# Altium PCB PCB1.PcbDoc
Units mil, origin at the board's own origin, x right, y up, seen from the top; angles counter-clockwise.
Board outline 2360 x 2360 mil, 2 copper layers (Top Layer, Bottom Layer); 82 components, 49 nets, 288 pads, 60 vias.
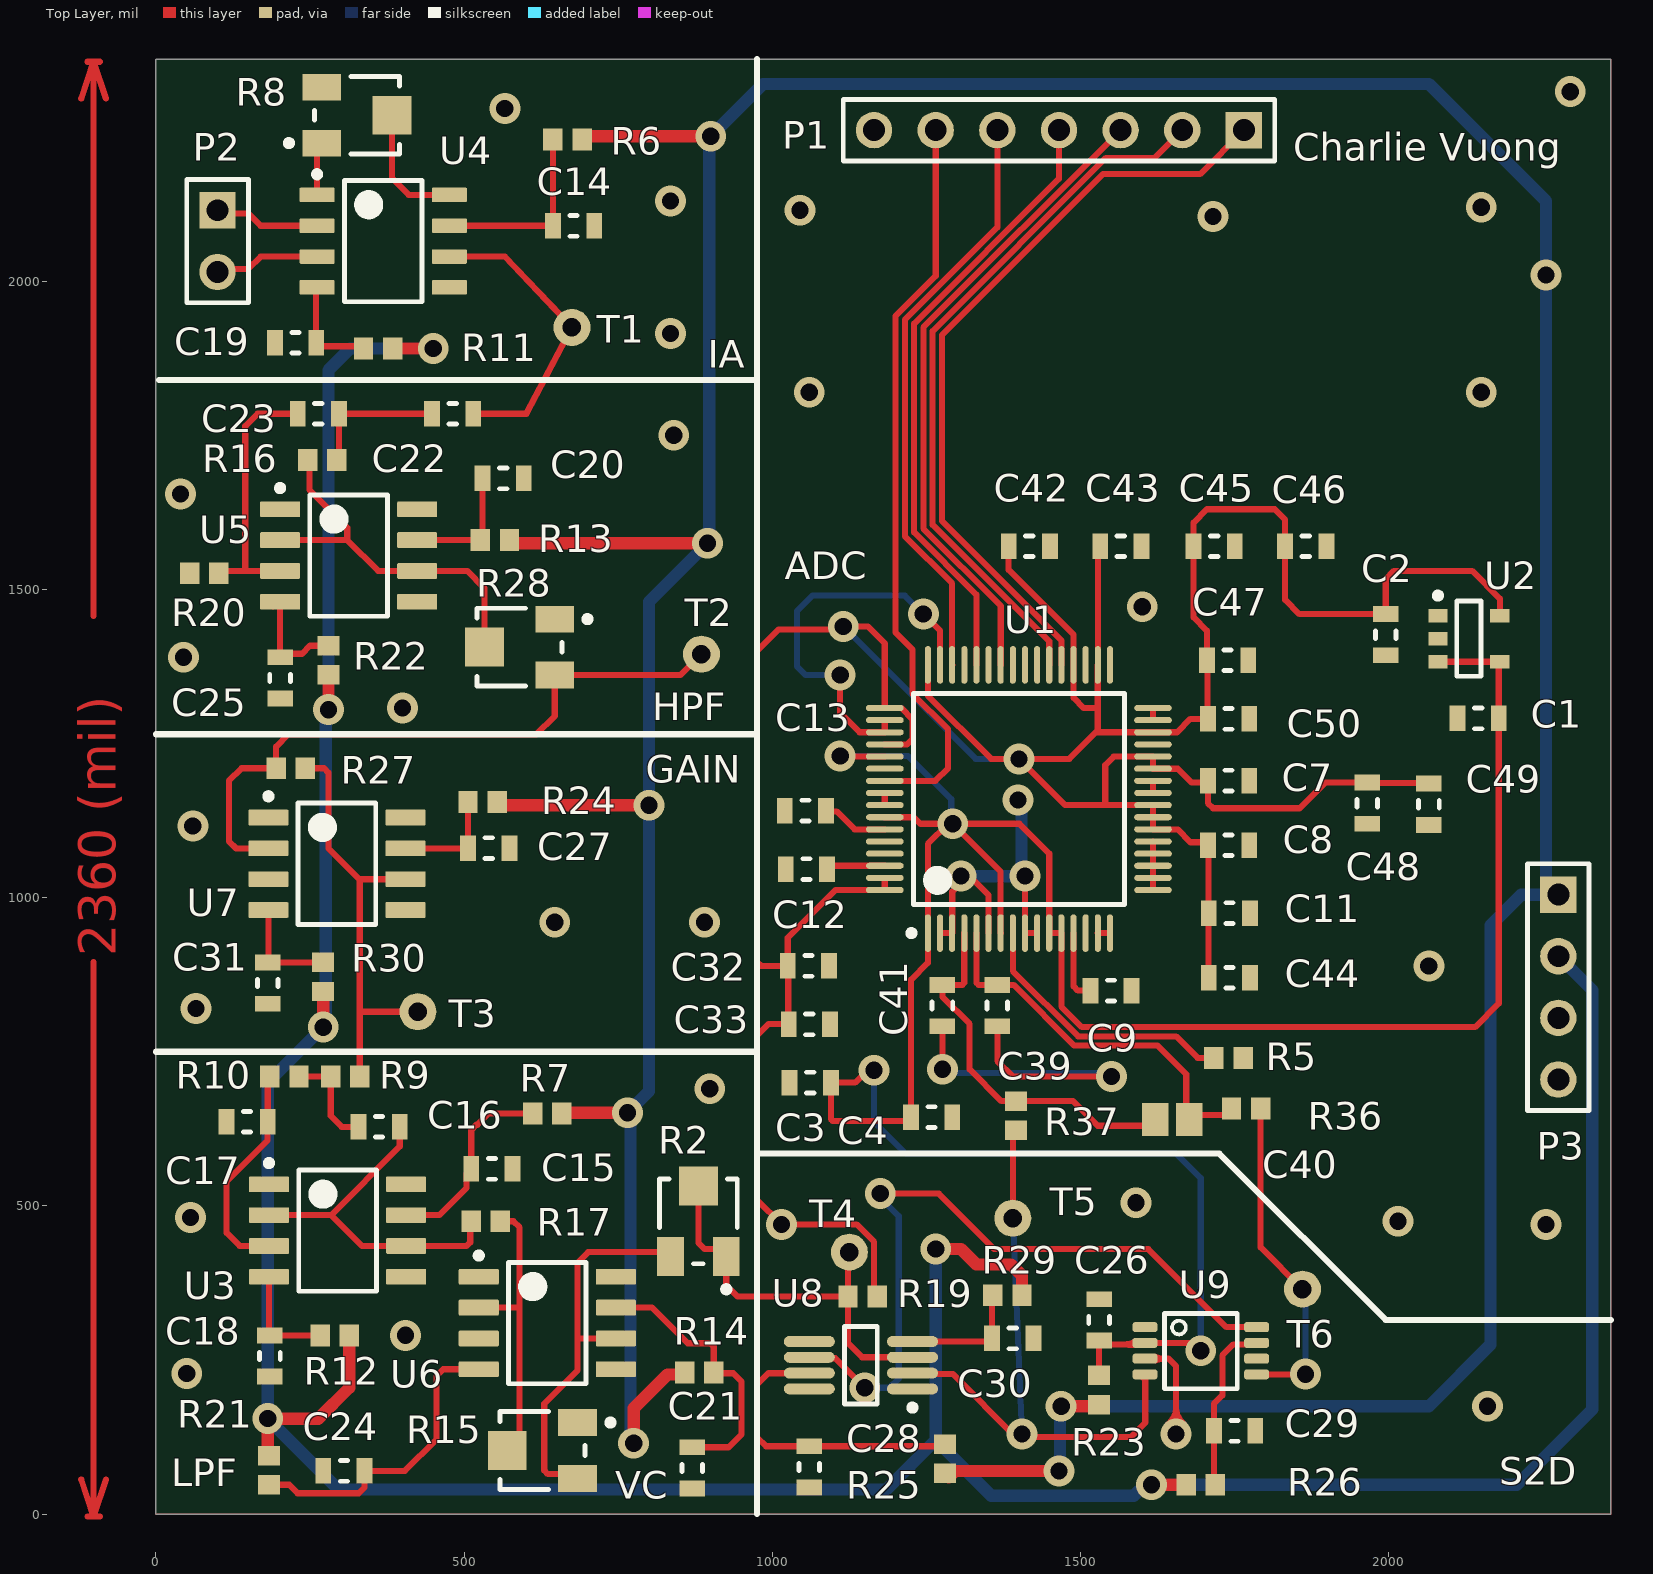
[diagram p0: Top Layer view]
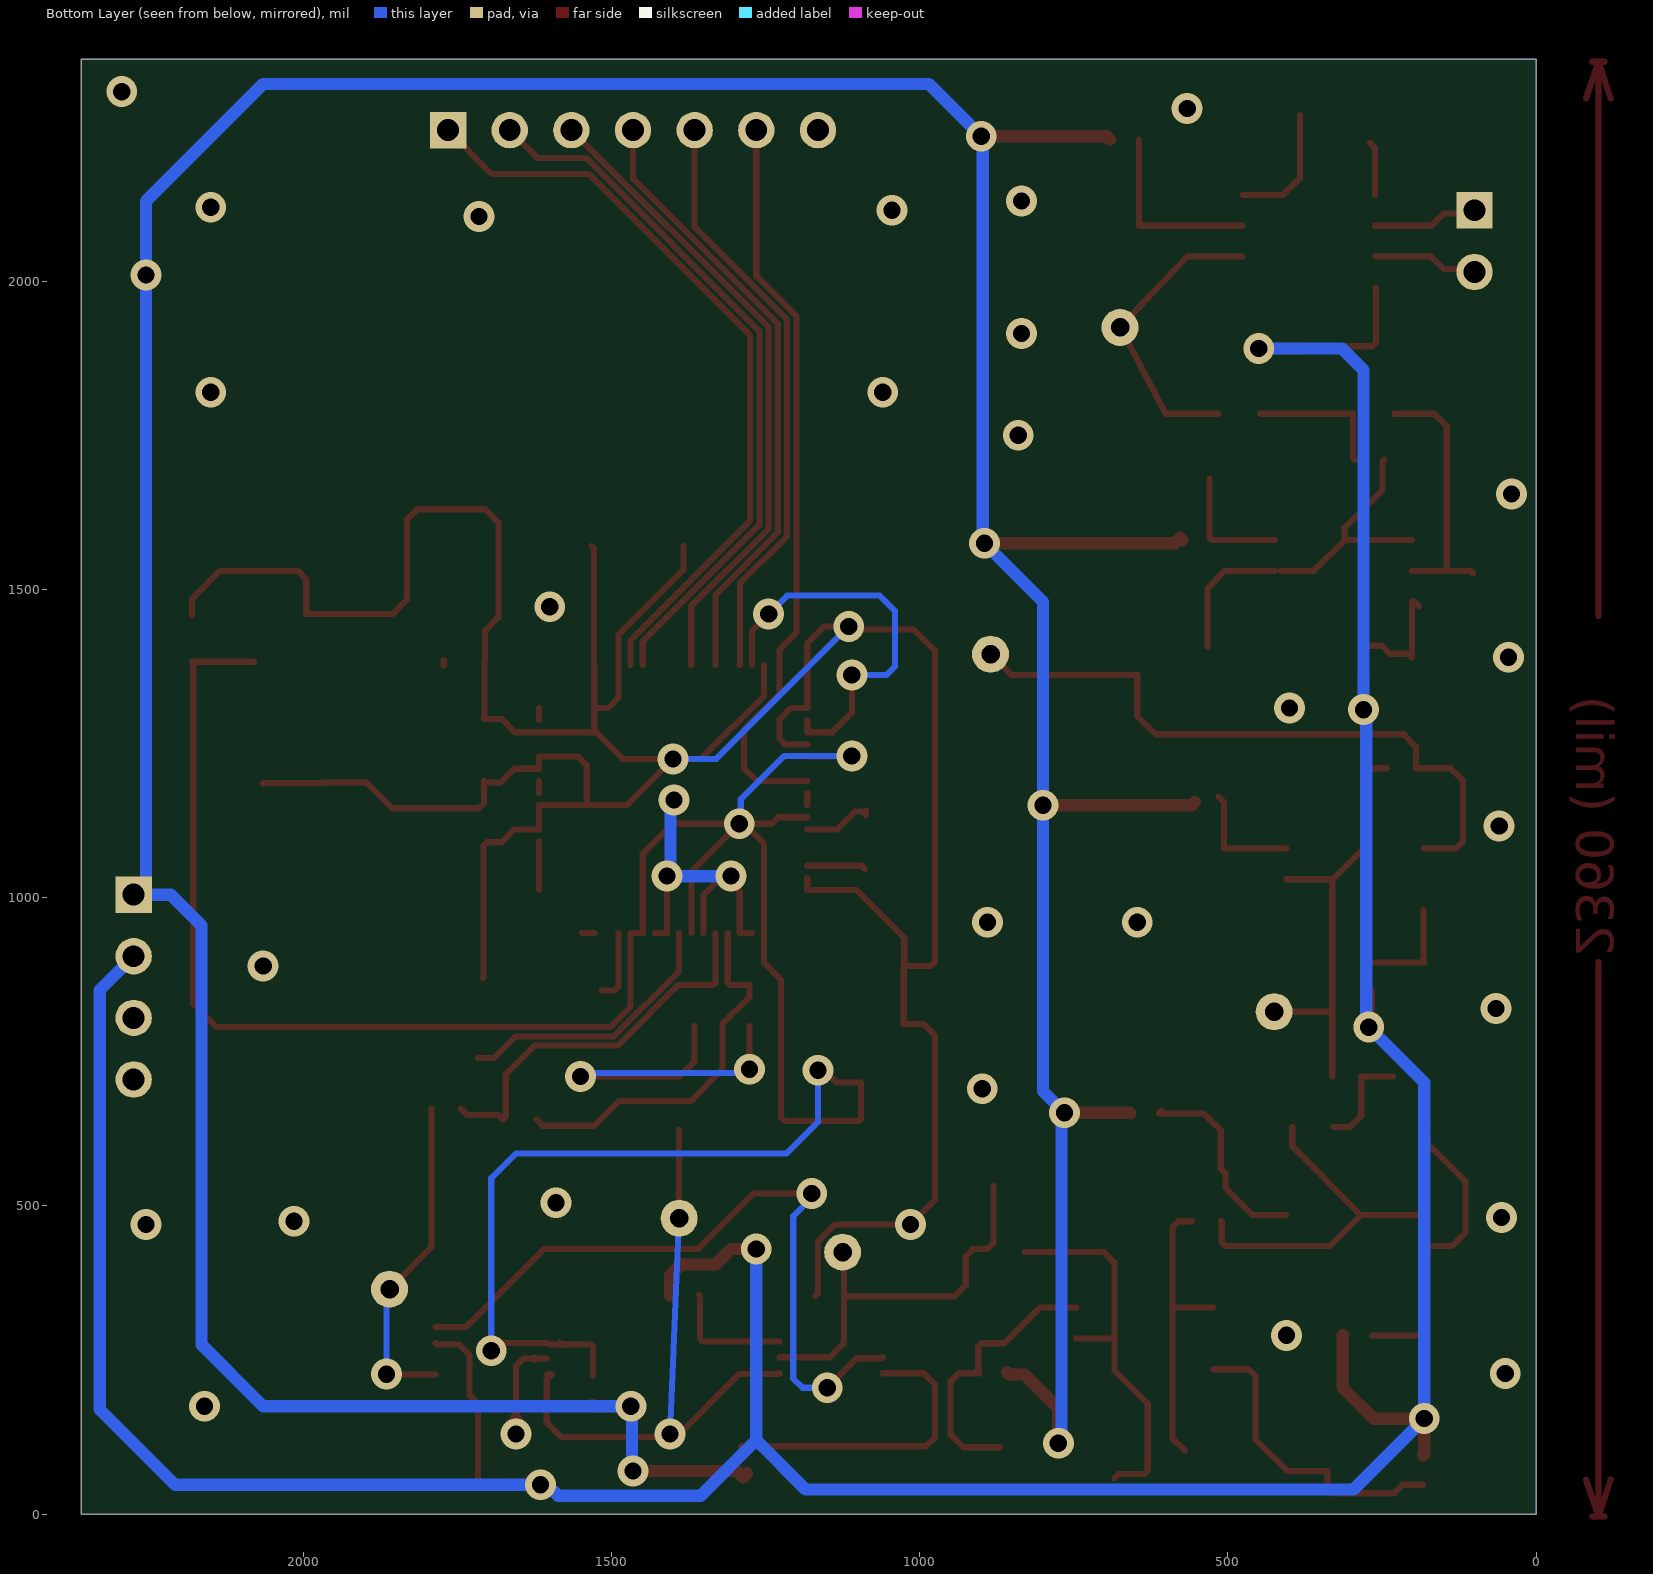
[diagram p1: Bottom Layer view, seen from below]

## Layer stack, top to bottom
Top Solder: solder mask 0.4, Solder Resist, Dk 3.5
Top Layer: signal copper 1.4
Dielectric 1: dielectric 12.6, FR-4, Dk 4.8
Bottom Layer: signal copper 1.4
Bottom Solder: solder mask 0.4, Solder Resist, Dk 3.5

## Board outline
0,0 0,2360 2360,2360 2360,0

## Design rules (kind name [scope] priority, off if disabled: settings)
Clearance [All] p1: gap=5 ignorepadtopadclearanceinfootprint=FALSE except(0: Arc-Hole Track-Hole SMDPad-Hole THPad-Hole Via-Hole Fill-Hole Poly-Hole Region-Hole Text-Text Text-Hole)
MinimumSolderMaskSliver [All] p1: minsoldermaskwidth=1
PolygonConnect [All] p1: connectstyle=Relief reliefconductorwidth=10 reliefentries=4 polygonreliefangle="90 Angle" airgapwidth=10
RoutingVias [All] p1: holewidth=28 width=50 viastyle="Through Hole" minholewidth=28 minwidth=50 maxholewidth=28 maxwidth=50
SilkToSilkClearance [All] p1: silktosilkclearance=5
SilkToSolderMaskClearance [IsPad] p1: minsilkscreentomaskgap=5 clearancetoexposedcopper=TRUE
SolderMaskExpansion [All] p1: expansion=4
Width [All] p1: maxlimit=30 minlimit=10 preferedwidth=10
27 further rules are at their usual default settings.

## Classes and differential pairs
polygon class PolygonClass_1: NONET_L01_P000
component class Sheet1: C14 C15 C16 C17 C18 C19 C20 C21 C22 C23 C24 C25 C26 C27 C28 C29 C30 C31 P2 P3 R2 R6 R7 R8 R9 R10 R11 R12 R13 R14 R15 R16 R17 R19 R20 R21 R22 R23 R24 R25 R26 R27 R28 R29 R30 U3 U4 U5 U6 U7 U8 U9
component class ADC: C1 C2 C3 C4 C7 C8 C9 C11 C12 C13 C32 C33 C39 C40 C41 C42 C43 C44 C45 C46 C47 C48 C49 C50 J1 P1 R5 R36 R37 U1 U2

## Components (designator, comment, footprint, x,y, rotation, side; value= is the part's Value field where it differs from the comment)
C1 "C1608X5R1A106K080AC" CAPC1608X90X20ML10 2145,1290.77 r180 top
C2 "C1608X5R1A106K080AC" CAPC1608X90X20ML10 1995,1426.54 r270 top
C3 "C1608X5R1A106K080AC" CAPC1608X90X20ML10 1061.54,700 r180 top
C4 "C1608X5R1A106K080AC" CAPC1608X90X20ML10 1258.46,644.13 r0 top
C7 "C1608X5R1A106K080AC" CAPC1608X90X20ML10 1740,1190 r0 top
C8 "C1608X5R1A106K080AC" CAPC1608X90X20ML10 1740,1085 r0 top
C9 "C1608X5R1A106K080AC" CAPC1608X90X20ML10 1549.37,849.29 r0 top
C11 "C1608X5R1A106K080AC" CAPC1608X90X20ML10 1741.54,975 r0 top
C12 "C1608X5R1A106K080AC" CAPC1608X90X20ML10 1055.28,1046.38 r180 top
C13 "C1608X5R1A106K080AC" CAPC1608X90X20ML10 1053.74,1141.38 r180 top
C14 "C1608X5R1A106K080AC" CAPC1608X90X20ML10 677.68,2089.76 r180 top
C15 "C1608X5R1A106K080AC" CAPC1608X90X20ML10 545,560 r180 top
C16 "C1608X5R1A106K080AC" CAPC1608X90X20ML10 362.13,628.27 r180 top
C17 "C1608X5R1A106K080AC" CAPC1608X90X20ML10 148.07,636.54 r0 top
C18 "C1608X5R1A106K080AC" CAPC1608X90X20ML10 185,256.54 r90 top
C19 "C1608X5R1A106K080AC" CAPC1608X90X20ML10 226.54,1900 r0 top
C20 "C1608X5R1A106K080AC" CAPC1608X90X20ML10 563.46,1680 r180 top
C21 "C1608X5R1A106K080AC" CAPC1608X90X20ML10 870,75 r90 top
C22 "C1608X5R1A106K080AC" CAPC1608X90X20ML10 481.54,1785 r0 top
C23 "C1608X5R1A106K080AC" CAPC1608X90X20ML10 263.46,1785 r0 top
C24 "C1608X5R1A106K080AC" CAPC1608X90X20ML10 305,70 r0 top
C25 "C1608X5R1A106K080AC" CAPC1608X90X20ML10 201.5,1356.54 r90 top
C26 "C1608X5R1A106K080AC" CAPC1608X90X20ML10 1530,315 r270 top
C27 "C1608X5R1A106K080AC" CAPC1608X90X20ML10 540,1080.44 r180 top
C28 "C1608X5R1A106K080AC" CAPC1608X90X20ML10 1060,76.54 r90 top
C29 "C1608X5R1A106K080AC" CAPC1608X90X20ML10 1750,135 r180 top
C30 "C1608X5R1A106K080AC" CAPC1608X90X20ML10 1390,285 r180 top
C31 "C1608X5R1A106K080AC" CAPC1608X90X20ML10 181.38,861.54 r90 top
C32 "C1608X5R1A106K080AC" CAPC1608X90X20ML10 1058.46,889.29 r0 top
C33 "C1608X5R1A106K080AC" CAPC1608X90X20ML10 1060,794.29 r0 top
C39 "C1608X5R1A106K080AC" CAPC1608X90X20ML10 1365,825 r270 top locked
C40 "C0805C100J5GACTU" CAPC2013X88X50LL20T25 1648.62,640 r0 top
C41 "C1608X5R1A106K080AC" CAPC1608X90X20ML10 1276.02,825 r270 top locked
C42 "C1608X5R1A106K080AC" CAPC1608X90X20ML10 1416.81,1570 r0 top
C43 "C1608X5R1A106K080AC" CAPC1608X90X20ML10 1565.28,1570 r0 top
C44 "C1608X5R1A106K080AC" CAPC1608X90X20ML10 1741.54,870 r0 top
C45 "C1608X5R1A106K080AC" CAPC1608X90X20ML10 1716.81,1570 r0 top
C46 "C1608X5R1A106K080AC" CAPC1608X90X20ML10 1865.28,1570 r0 top
C47 "C1608X5R1A106K080AC" CAPC1608X90X20ML10 1738.46,1385 r0 top
C48 "C1608X5R1A106K080AC" CAPC1608X90X20ML10 1965,1153.27 r270 top
C49 "C1608X5R1A106K080AC" CAPC1608X90X20ML10 2065,1151.54 r270 top
C50 "C1608X5R1A106K080AC" CAPC1608X90X20ML10 1740,1290 r0 top
P1 "Header 7" HDR1X7 1765,2245 r180 top
P2 "Header 2" HDR1X2 100,2115 r270 top locked
P3 "Header 4" HDR1X4 2275,1005 r270 top
R2 "3313J-1-103E" BOUR-3313J-1_V 880,475 r90 top
R5 "RR0816P-241-D" RESC1608X50X30LL20T20 1740,740 r0 top
R6 "10" RESC1608X50X30LL20T20 667.76,2229.76 r0 top
R7 "10" RESC1608X50X30LL20T20 635,650 r0 top
R8 "3313J-1-103E" BOUR-3313J-1_V 326.06,2269.29 r0 top
R9 "10" RESC1608X50X30LL20T20 307.24,710 r0 top
R10 "10" RESC1608X50X30LL20T20 208.62,710 r0 top
R11 "10" RESC1608X50X30LL20T20 360.43,1890.59 r0 top
R12 "10" RESC1608X50X30LL20T20 290,290 r0 top
R13 "10" RESC1608X50X30LL20T20 550,1580 r0 top
R14 "10" RESC1608X50X30LL20T20 881.38,230 r180 top
R15 "3313J-1-103E" BOUR-3313J-1_V 627.13,103.25 r180 top
R16 "10" RESC1608X50X30LL20T20 270,1710 r0 top
R17 "10" RESC1608X50X30LL20T20 535,475 r180 top
R19 "10" RESC1608X50X30LL20T20 1146.38,353.07 r0 top
R20 "10" RESC1608X50X30LL20T20 78.62,1526.38 r180 top
R21 "10" RESC1608X50X30LL20T20 183.54,71.38 r90 top
R22 "10" RESC1608X50X30LL20T20 280,1385 r270 top
R23 "10" RESC1608X50X30LL20T20 1530,201.38 r270 top
R24 "10" RESC1608X50X30LL20T20 530,1155 r0 top
R25 "10" RESC1608X50X30LL20T20 1280,90 r270 top
R26 "10" RESC1608X50X30LL20T20 1695,47.76 r180 top
R27 "10" RESC1608X50X30LL20T20 218.62,1210 r180 top
R28 "3313J-1-103E" BOUR-3313J-1_V 590,1406.54 r180 top
R29 "10" RESC1608X50X30LL20T20 1381.38,355 r0 top
R30 "10" RESC1608X50X30LL20T20 271.38,871.38 r270 top
R36 "10" RESC1608X50X30LL20T20 1768.46,658.27 r180 top
R37 "10" RESC1608X50X30LL20T20 1395,646.38 r90 top
U1 "ADS1675IPAG" TI-PAG64_L 1400,1160 r90 top
U2 "LM4132AMF-3.3/NOPB" DBV0005A_L 2130,1420.12 r0 top
U3 "OP07CDR" D0008A_M 294.76,460 r0 top
U4 "INA128U" D0008A_N 368.86,2065 r0 top
U5 "OP07CDR" D0008A_M 312.72,1555 r0 top
U6 "OP07CDR" D0008A_M 635,310 r0 top
U7 "OP07CDR" D0008A_M 293.78,1055 r0 top
U8 "OP1177ARMZ" ADI-RM-8_M 1143.66,241.61 r180 top
U9 "AD8476" MSOP8 1695,265 r0 top

## Footprints (in the part's own frame and the unit in brackets; to place one, negate y for a bottom-side part, rotate by r counter-clockwise, add the part's x,y. Pads: shape width x height; smd on the part's side, far side on the other; paste and mask are expansions set on the pad)
ADI-RM-8_M [mm] "SOP, 8-Leads, Body 3x3mm, Pitch 0.65mm, IPC Low Density"
  oval 2.1x0.45 smd: 1(-2.125,0.975) 2(-2.125,0.325) 3(-2.125,-0.325) 4(-2.125,-0.975) 5(2.125,-0.975) 6(2.125,-0.325) 7(2.125,0.325) 8(2.125,0.975)
  silkscreen extent -2.25,-1.6 0.67,1.87, body extent -1.6,-1.6 1.6,1.6, height 1.1
BOUR-3313J-1_V [mm] "SMD, 3-Leads, Body 3.5x3.2mm, Pitch 1.15mm"
  rect 1.6x1.1 smd paste+0: 1(-1.45,-1.15) 3(-1.45,1.15)
  rect 1.6x1.6 smd paste+0: 2(1.45,0)
  silkscreen extent -2.92,-1.6 1.75,1.6, body extent -1.75,-1.65 1.75,1.65, height 2.11
CAPC1608X90X20ML10 [mm] "Chip Capacitor, 2-Leads, Body 1.70x0.90mm, IPC Low Density"
  rect 0.65x1.05 smd: 1(-0.85,0) 2(0.85,0)
  silkscreen extent -0.15,-0.43 0.15,0.43, body extent -0.85,-0.45 0.85,0.45, height 0.9
CAPC2013X88X50LL20T25 [mm] "Chip Capacitor, 2-Leads, Body 2.00x1.25mm, IPC High Density"
  rect 1.1x1.35 smd: 1(-0.7,0) 2(0.7,0)
  body extent -1.1,-0.72 1.1,0.72, height 0.88
D0008A_M [mm] "SOIC, 8-Leads, Body 5x4mm, Pitch 1.27mm, IPC Low Density"
  rrect15% 1.65x0.65 smd: 1(-2.825,1.905) 2(-2.825,0.635) 3(-2.825,-0.635) 4(-2.825,-1.905) 5(2.825,-1.905) 6(2.825,-0.635) 7(2.825,0.635) 8(2.825,1.905)
  silkscreen extent -2.95,-2.5 1.6,2.9, body extent -3,-2.45 3,2.45, height 1.63
D0008A_N [mm] "SOIC, 8-Leads, Body 5x4mm, Pitch 1.27mm, IPC Medium Density"
  rrect17% 1.45x0.6 smd: 1(-2.725,1.905) 2(-2.725,0.635) 3(-2.725,-0.635) 4(-2.725,-1.905) 5(2.725,-1.905) 6(2.725,-0.635) 7(2.725,0.635) 8(2.725,1.905)
  silkscreen extent -2.85,-2.5 1.6,2.88, body extent -3,-2.45 3,2.45, height 1.63
DBV0005A_L [mm] "SOT23, 5-Leads, Body 3.05x1.75mm, Pitch 0.95mm, IPC High Density"
  rect 0.8x0.55 smd: 1(-1.275,0.95) 2(-1.275,0) 3(-1.275,-0.95) 4(1.275,-0.95) 5(1.275,0.95)
  silkscreen extent -1.4,-1.55 0.5,1.9, body extent -1.42,-1.46 1.42,1.46, height 1.08
HDR1X2 [mm] "Connector; Header; 2 Position"
  rect 1.5x1.5 hole 0.9: 1(0,0)
  round 1.5 hole 0.9: 2(2.54,0)
  silkscreen extent -1.27,-1.27 3.81,1.27
HDR1X4 [mm] "Connector; Header; 4 Position"
  rect 1.5x1.5 hole 0.9: 1(0,0)
  round 1.5 hole 0.9: 2(2.54,0) 3(5.08,0) 4(7.62,0)
  silkscreen extent -1.27,-1.27 8.89,1.27
HDR1X7 [mm] "Connector; Header; 7 Position"
  rect 1.5x1.5 hole 0.9: 1(0,0)
  round 1.5 hole 0.9: 2(2.54,0) 3(5.08,0) 4(7.62,0) 5(10.16,0) 6(12.7,0) 7(15.24,0)
  silkscreen extent -1.27,-1.27 16.51,1.27
MSOP8 [mm]
  rrect50% 1.02x0.41 smd: 1(-2.3,0.975) 2(-2.3,0.325) 3(-2.3,-0.325) 4(-2.3,-0.975) 5(2.3,-0.975) 6(2.3,-0.325) 7(2.3,0.325) 8(2.3,0.975)
  silkscreen extent -1.5,-1.57 1.5,1.53, body extent -2.46,-1.49 2.44,1.51, height 1.15
RESC1608X50X30LL20T20 [mm] "Chip Resistor, 2-Leads, Body 1.60x0.80mm, IPC High Density"
  rect 0.8x0.9 smd: 1(-0.6,0) 2(0.6,0)
  body extent -0.9,-0.5 0.9,0.5, height 0.5
TI-PAG64_L [mm] "QFP, 64-Leads, Body 10x10mm, Pitch 0.5mm, IPC High Density"
  oval 1.55x0.25 smd: 1(-5.525,3.75) 2(-5.525,3.25) 3(-5.525,2.75) 4(-5.525,2.25) 5(-5.525,1.75) 6(-5.525,1.25) 7(-5.525,0.75) 8(-5.525,0.25) 9(-5.525,-0.25) 10(-5.525,-0.75) 11(-5.525,-1.25) 12(-5.525,-1.75) 13(-5.525,-2.25) 14(-5.525,-2.75) 15(-5.525,-3.25) 16(-5.525,-3.75) 33(5.525,-3.75) 34(5.525,-3.25) 35(5.525,-2.75) 36(5.525,-2.25) 37(5.525,-1.75) 38(5.525,-1.25) 39(5.525,-0.75) 40(5.525,-0.25) 41(5.525,0.25) 42(5.525,0.75) 43(5.525,1.25) 44(5.525,1.75) 45(5.525,2.25) 46(5.525,2.75) 47(5.525,3.25) 48(5.525,3.75)
  oval 0.25x1.55 smd: 17(-3.75,-5.525) 18(-3.25,-5.525) 19(-2.75,-5.525) 20(-2.25,-5.525) 21(-1.75,-5.525) 22(-1.25,-5.525) 23(-0.75,-5.525) 24(-0.25,-5.525) 25(0.25,-5.525) 26(0.75,-5.525) 27(1.25,-5.525) 28(1.75,-5.525) 29(2.25,-5.525) 30(2.75,-5.525) 31(3.25,-5.525) 32(3.75,-5.525) 49(3.75,5.525) 50(3.25,5.525) 51(2.75,5.525) 52(2.25,5.525) 53(1.75,5.525) 54(1.25,5.525) 55(0.75,5.525) 56(0.25,5.525) 57(-0.25,5.525) 58(-0.75,5.525) 59(-1.25,5.525) 60(-1.75,5.525) 61(-2.25,5.525) 62(-2.75,5.525) 63(-3.25,5.525) 64(-3.75,5.525)
  silkscreen extent -5.65,-4.35 4.35,4.55, body extent -5,-5 5,5, height 1.2

## Part data
C1 C2 C3 C4 C7 C8 C9 C11 C12 C13 C14 C15 C16 C17 C18 C19 C20 C21 C22 C23 C24 C25 C26 C27 C28 C29 C30 C31 C32 C33 C39 C41 C42 C43 C44 C45 C46 C47 C48 C49 C50: library part CMP-2000-04979-1, "Chip Capacitor, 10 uF, +/- 10%, 10 V, -55 to 85 degC, 0603 (1608 Metric), RoHS, Tape and Reel", Capacitance=10µF, Manufacturer=TDK, Operating Temperature=-55degC~85degC, Package / Case=0603(1608Metric), Package Description="2-Pin Surface Mount Device, Body 1.6 x 0.8 mm", Package Reference=603, PCN Part Number=MLCCPartNumberChange30/Nov/2012, Ratings=-, Standard Package=1, Temperature Coefficient=X5R, Tolerance=±10%, Voltage - Rated=10V, Applications=GeneralPurpose, Category=Capacitors, Datasheet URL=http://download.siliconexpert.com/pdfs/2015/4/21/15/54/45/779/tdk_/manual/37024850441143360mlcc_commercial_general_en.pdf, Datasheet Version=Mar-15, Design Resources=20WNon-IsolatedBuckLEDDriverUsingPLLNK460KG, Family=CeramicCapacitors, Features=-, Height - Seated (Max)=-, Kits=445-9003-KIT-ND-KITCAPCERHICAPMLCCSMD, Lead Spacing=-, Lead Style=-, Manufacturer URL=http://www.tdk.com/, Mounting Type=SurfaceMount,MLCC, Online Catalog=CSeries,GeneralPurpose, Other Names=445-7486-1, Packaging=CutTape(CT), Product Training Modules=CSeriesGeneralApplicationsSEAT,CCV,andTVCLDesignToolsGuidetoReplacinganElectrolyticCapacitorwithanMLCC, RoHS Information=RoHSCertificate-MLCC, Series=C, Size / Dimension="0.063\"Lx0.031\"W(1.60mmx0.80mm)", Thickness (Max)="0.035\"(0.90mm)"
C40: library part CMP-2007-00219-1, Manufacturer=Kemet, Part Number=C0805C100J5GACTU
P1: "Header, 7-Pin", LatestRevisionDate=17-Jul-2002, LatestRevisionNote="Re-released for DXP Platform.", Publisher="Altium Limited"
P2: "Header, 2-Pin", LatestRevisionDate=17-Jul-2002, LatestRevisionNote="Re-released for DXP Platform.", Publisher="Altium Limited"
P3: "Header, 4-Pin", LatestRevisionDate=17-Jul-2002, LatestRevisionNote="Re-released for DXP Platform.", Publisher="Altium Limited"
R2 R8 R15 R28: library part CMP-2000-05585-1, "Trimming Potentiometer, 10 KOhm, -55 to 125 degC, 3-Pin SMD, RoHS, Tape and Reel", Manufacturer=Bourns, Package Description="3-Pin Surface Mount Device, Body 3.5 x 3.2 mm, Pitch 1.15 mm", Package Reference=3313J-1, Power Rating=125mW, Resistance Tolerance=±20%, Temperature Coefficient=±100ppm/°C, Track Resistance=10kohm, Datasheet URL=http://www.bourns.com/docs/Product-Datasheets/3313.pdf, Datasheet Version=05/2016, Manufacturer URL=http://www.bourns.com/, Mounting Technology=SurfaceMount, No. of Turns=1, Potentiometer Mounting=SMD, RoHS Compliant=Yes, SVHC=NoSVHC(16-Jun-2014)
R5: library part CMP-2000-02559-1, Manufacturer=Susumu, Part Number=RR0816P-241-D
R6 R7 R9 R10 R11 R12 R13 R14 R16 R17 R19 R20 R21 R22 R23 R24 R25 R26 R27 R29 R30 R36 R37: library part CMP-2000-02559-1, Manufacturer=Susumu, Part Number=RR0816P-241-D
U1: library part CMP-0003-00593-1, "4 MSPS, 24-Bit ADC, -40 to 85 degC, 64-pin QFP (PAG64), Green (RoHS & no Sb/Br)", Analog Voltage AV/DD(Max)(V)=5.25, Analog Voltage AV/DD(Min)(V)=4.75, Manufacturer="Texas Instruments", # Input Channels=1, Architecture=Delta-Sigma, Code_JEDEC=MS-026, ComponentLink1Description="Manufacturer URL", ComponentLink1URL=http://www.ti.com/, ComponentLink2Description=Datasheet, ComponentLink2URL=http://www.ti.com/general/docs/lit/getliterature.tsp?genericPartNumber=ADS1675&fileType=pdf, ComponentLink3Description="Package Specification", ComponentLink3URL=http://www.ti.com/lit/ml/mtqf006a/mtqf006a.pdf, DatasheetVersion=SBAS416D, Digital Supply(Max)(V)=3.15, Digital Supply(Min)(V)=2.85, Eco-Plan="Green (RoHS & no Sb/Br)", Interface="Parallel LVDS, Serial SPI", Mounting Technology="Surface Mount", PackageDescription="64-Pin Plastic Flat Pack, Body 10 x 10 mm, Pitch 0.50 mm", PackageReference=PAG64, PackageVersion="4040282/C, 11/1996", PartNumber=ADS1675IPAG, Resolution(Bits)=24, Sample Rate (max)(SPS)=4M, SFDR(dB)=120, SNR(dB)=92, SubFamily="Precision ADC (<=10MSPS)"
U2: library part CMP-0074-00542-5, "Precision Low Dropout Voltage Reference, 5-pin SOT-23, Pb-Free", Manufacturer="Texas Instruments", PackageTopMarking=R4EA*XTT, PowerWise=Y, ComponentLink1Description=Datasheet, ComponentLink1URL=http://www.ti.com/general/docs/lit/getliterature.tsp?genericPartNumber=LM4132&fileType=pdf, CompType="Voltage Reference IC", DatasheetVersion=Aug-2006, High-Reliability=Y, PackageDescription="Molded SOT-23, .115 x .063 x .040 in Body, 5 Lead, .0375 in Pitch", PackageReference=DBV0005A, PackageVersion="revD, Aug-2008", PartNumber=LM4132AMF-3.3/NOPB, PinCount=5, RevisionNote="PowerWise parameter updated.", RoHS=Y
U3 U5 U6 U7: library part CMP-0015-00070-2, "Low-Offset Voltage Operational Amplifier, 6 to 36 V, 0 to 70 degC, 8-pin SOIC (D8), Green (RoHS & no Sb/Br)", Manufacturer="Texas Instruments", Rating=Catalog, Total Supply Voltage(Max)(+5V is 5, +/-5V is 10)=36, Total Supply Voltage(Min)(+5V is 5, +/-5V is 10)=6, CMRR(Min)(dB)=100, Code_JEDEC=MS-012, ComponentLink1Description="Manufacturer URL", ComponentLink1URL=http://www.ti.com/, ComponentLink2Description=Datasheet, ComponentLink2URL=http://www.ti.com/lit/ds/symlink/op07c.pdf, ComponentLink3Description="Package Specification", ComponentLink3URL=http://www.ti.com/litv/pdf/msoi002j, DatasheetVersion=SLOS099E, Eco-Plan="Green (RoHS & no Sb/Br)", GBW(Typ)(MHz)=0.6, IIB(Max)(pA)=7000, Iq per channel(Max)(mA)=5, Mounting Technology="Surface Mount", Number of Channels=1, Offset Drift(Typ)(uV/C)=0.5, PackageDescription="8-Pin Plastic Small Outline, Body 4.9 x 3.9 mm, Pitch 1.27 mm", PackageReference=D0008A, PackageVersion="4040047-3/M, 06/2011", PartNumber=OP07CDR, Slew Rate(Typ)(V/us)=0.3, Sub Family="General Purpose Amplifier, High Supply Voltage Amplifier (>=30V), Low Noise Amp (<=10nV/rtHz), Low Offset Voltage Amplifier (<=500uV)", Vio (25C)(Max)(mV)=0.15, Vn at 1kHz(Typ)(nV/rtHz)=9.8
U4: library part CMP-0992-00017-2, "Precision, Low Power Instrumentation Amplifier, -40 to 85 degC, 8-pin SOIC (D8), Green (RoHS & no Sb/Br)", Input Bias Current (+/-)(Max)(nA)=5, Manufacturer="Texas Instruments", Quiescent Current (+/-)(Typ)(mA)=0.7, CMRR(Min)(dB)=120, Code_JEDEC=MS-012, ComponentLink1Description="Manufacturer URL", ComponentLink1URL=http://www.ti.com/, ComponentLink2Description=Datasheet, ComponentLink2URL=http://www.ti.com/general/docs/lit/getliterature.tsp?genericPartNumber=INA128&fileType=pdf, ComponentLink3Description="Package Specification", ComponentLink3URL=http://www.ti.com/litv/pdf/msoi002j, DatasheetVersion=SBOS051B, Eco-Plan="Green (RoHS & no Sb/Br)", Gain(V/V)="1 to 10000", Input Offset (+/-)(Max)(uV)=50, Input Offset Drift (+/-)(Max)(uV/Degrees Celsius)=0.5, Mounting Technology="Surface Mount", Noise at 1kHz(Typ)(nV/rt(Hz))=8, Non-Linearity (+/-)(Max)(%)=0.002, Number of Channels=1, PackageDescription="8-Pin Plastic Small Outline, Body 4.9 x 3.9 mm, Pitch 1.27 mm", PackageReference=D0008A, PackageVersion="4040047-3/M, 06/2011", PartNumber=INA128U, SubFamily="Dual Supply", Vs(Max)(V)=36, Vs(Min)(V)=4.5
U8: library part ADI-AD_ADA_OPXXXX-X-8, "Single Channel Wide Bandwidth Operational Amplifier, 1.3 MHz BW, 700 mV/us SR, Industrial, 8-pin SOP (RM-8), Tube", Amplifiers Per Package=1, Generic Part Number=OP1177, Input Bias Current=500pA, Input Offset Voltage=15uV, Manufacturer="Analog Devices", Code_JEDEC=MO-187-AA, ComponentLink1Description="Manufacturer URL", ComponentLink1URL=http://www.analog.com/en/index.html, ComponentLink2Description=Datasheet, ComponentLink2URL=http://www.analog.com/static/imported-files/data_sheets/OP1177_2177_4177.pdf, ComponentLink3Description="Package Specification", ComponentLink3URL=http://www.analog.com/static/imported-files/packages/PKG_PDF/MSOP%28RM%29/RM_8.pdf, ComponentLink4Description="Reference Circuit", ComponentLink4URL=http://www.analog.com/en/all-operational-amplifiers-op-amps/operational-amplifiers-op-amps/op1177/products/product.html#product-recommendations, DatasheetVersion="Rev. G", Iq/Amp=500uA, Mounting Technology="Surface Mount", PackageDescription="8-Pin Mini Small Outline Package, Body 3 x 3 mm, Pitch 0.65 mm", PackageReference=RM-8, PartNumber=OP1177ARMZ, RevisionNote="Reference Circuit URL fixed", Slew Rate=700mV/us, Small Signal Bandwidth=1.3MHz, V Span Max=36V, V Span Min=5V

## Free pads (board coordinates)
  round 60 hole 30: 2(675,1925) 5(425,815) 7(1125,425) 8(1390.16,480) 9(1860,365) 10(885,1395)

## Via types
v1: diameter 50, hole 28, Top Layer to Bottom Layer, 60 vias

## Nets (pads, with @x,y where several pads share a name; then routed paths per layer and width w, separated by ;. In a path a pad name is that pad's centre, name@x,y a point inside that pad or via, vN(x,y) a via of type N, cw(c..) or ccw(c..) an arc to the next point about the centre after c; other vN are vias at no path point)
+5V: P3.1 R6.2 R7.2 R13.2 R14.2 R23.2 R24.2 R25.2 | length 7750
  Top Layer w20: R24.2 558.62,1150 v1(800,1150) ; R13.2 577.24,1583.62 585.87,1575 v1(895,1575) ; R7.2 659.72,651.09 v1(765,651.09) ; R6.2 696.61,2235 v1(900,2235) ; v1(775,115) 775,171.61 830,226.61 854.37,226.61 R14.2 ; R25.2 1286.38,60 1296.38,70 v1(1465,70) ; v1(1468.52,175) 1527.24,175 R23.2 ; v1@2253.46,2008.46 v1(2255,2010)
  Bottom Layer w10: P3.1@2255,1025 P3.1
  Bottom Layer w20: v1(775,115) 770,120 770,646.09 v1(765,651.09) 800,686.09 v1(800,1150) 800,1480 v1(895,1575) 897.5,1577.5 897.5,2232.5 v1(900,2235) 985,2320 2065,2320 2255,2130 v1(2255,2010) P3.1@2255,1025 ; v1(1465,70) 1466.76,71.76 1466.76,173.24 v1(1468.52,175) 2065,175 2165,275 2165,955 2215,1005 P3.1
-5V: P3.2 R11.2 R12.2 R21.2 R22.2 R26.2 R29.2 R30.2 | length 6043.9
  Top Layer w20: R21.2 181.38,97.17 v1(181.38,155) 263.62,155 313.62,205 R12.2 ; R30.2 271.54,847.6 v1(271.54,790) ; v1(280,1305) R22.2 ; R11.2 384.25,1890.79 v1(450,1890.79) ; v1(1265,430) 1306.02,430 1331.02,405 1387.09,405 1405,387.09 R29.2 ; v1(1615,47.76) R26.2
  Bottom Layer w20: v1(450,1890.79) 315,1890.79 280,1855.79 v1(280,1305) 275.77,1300.77 275.77,794.23 v1(271.54,790) 181.38,699.84 v1(181.38,155) 296.38,40 1185,40 1265,120 ; v1(1265,430) 1265,120 ; P3.2 2330,850 2330,170 2207.76,47.76 v1(1615,47.76) 1604.18,47.76 1586.42,30 1355,30 1265,120
CLK: P1.6 U1.55 | length 1208.2
  Top Layer w10: U1.55 1182.56,1189.45 1264.45,1189.45 1285,1210 1285,1273.51 1227.32,1331.19 1227.32,1402.8 1200,1430.12 1200,1943.64 1265,2008.64 P1.6
CS: P1.2 U1.38 | length 1159.8
  Top Layer w10: U1.38 1449.13,1377.6 1449.13,1415.87 1260,1605 1260,1918.79 1541.21,2200 1620,2200 P1.2
DOUT: P1.4 U1.44 | length 1006.7
  Top Layer w10: U1.44 1331.02,1377.6 1331.02,1491.55 1230,1592.57 1230,1931.21 1465,2166.21 P1.4
DRATE0: C2.1 C7.1 C8.1 C11.1 C32.1 C33.1 C42.1 C43.1 C44.1 C45.1 C46.1 C47.1 C48.1 C49.1 C50.1 R19.2 U1.22 U1.23 U1.24 U1.27 U1.28 U1.30 U1.34 U1.36 U1.48 U1.49 U1.52 U1.63 U1.64 U2.5 | length 5975.7
  Top Layer w10: C33.1 C33.1@1025.77,795.06 ; R19.2 1165,358.07 1165,441.57 1136.57,470 v1(1015,470) 975,510 975,776.4 993.66,795.06 C33.1@1025.77,795.06 ; U1.63 U1.64 1102.36,1012.36 1025,935 C32.1 ; U1.52 1182.56,1248.66 1218.66,1248.66 1227.32,1257.32 1227.32,1289.8 1209.57,1307.56 1182.56,1307.56 U1.49 1182.48,1412.52 1155,1440 v1(1115,1440) 1110,1435 1010,1435 975,1400 975,896.18 981.89,889.29 C32.1 ; U1.48 1252.36,1327.64 1355,1225 v1(1400,1225) ; C42.1 1383.35,1531.65 1488.58,1426.42 U1.36 1488.58,1324.06 1505,1307.64 1527.95,1307.64 1527.95,1271.22 1525,1268.27 ; 1527.95,1310 U1.34 1528.03,1377.6 1528.03,1566.22 C43.1 ; C44.1 1707.3,870.77 1707.3,1084.23 C8.1 1701.54,1090 1678.23,1090 1657.52,1110.71 1617.6,1110.71 U1.22 U1.23 U1.24 1540,1150.16 ; C49.1 2064.13,1185.87 1965.87,1185.87 C48.1 1896.89,1186.73 1855.16,1145 1715,1145 1706.54,1153.46 C7.1 1703.27,1186.73 1680,1186.73 1657.6,1209.13 1617.6,1209.13 U1.27 U1.28 1553.9,1228.9 1540,1215 1540,1150.16 ; U2.5 2180.2,1484.8 2135,1530 2008.35,1530 1995,1516.65 C2.1 1855,1460 1831.81,1483.19 C46.1 1831.81,1613.19 1815,1630 1705,1630 1683.35,1608.35 C45.1 1683.35,1454.92 1705,1433.27 C47.1 1705.77,1384.23 1705.77,1290.77 C50.1 1678.23,1290 1656.57,1268.35 1617.6,1268.35 U1.30 1525,1268.27 ; C32.1 1025.77,888.52 C33.1@1025.77,795.06 ; v1(1400,1225) 1481.73,1225 1525,1268.27 ; v1(1400,1225) 1474.84,1150.16 1540,1150.16
  Bottom Layer w10: v1(1115,1440) 1330,1225 v1(1400,1225)
DRATE1: C1.2 C2.2 C3.2 C4.2 C7.2 C8.2 C9.2 C11.2 C12.2 C13.2 C14.1 C15.1 C17.1 C18.1 C19.1 C20.1 C21.1 C24.1 C25.1 C26.1 C27.1 C28.1 C29.1 C30.1 C31.1 C32.2 C33.2 C39.2 C41.2 C42.2 C43.2 C44.2 C45.2 C46.2 C47.2 C48.2 C49.2 C50.2 P1.7 P3.3 P3.4 R5.2 R20.2 U1.2 U1.3 U1.6 U1.9 U1.10 U1.14 U1.15 U1.16 U1.17 U1.18 U1.19 U1.20 U1.21 U1.25 U1.26 U1.29 U1.31 U1.32 U1.33 U1.35 U1.47 U1.50 U1.51 U1.54 U1.56 U1.57 U1.60 U1.61 U2.2 U4.5 U6.3 U7.3 U9.1 U9.3 | length 2163.3
  Top Layer w10: v1(1110,1361.38) 1110,1300 1141.65,1268.35 1182.4,1268.35 U1.51 U1.50 U1.50@1182.4,1288.03 ; U1.57 U1.56 ; v1(1245,1460) 1272.05,1432.95 U1.47 ; U1.2 U1.3 1291.73,1009.88 1306.02,1024.18 v1@1306.02,1026.02 ; v1(1276.02,721.54) C41.2 ; v1(1306.02,1035) v1@1306.02,1026.02 ; U1.6 1350.71,942.56 1350.71,1004.29 1328.98,1026.02 v1@1306.02,1026.02 ; C39.2 1365,735 1390,710 v1(1550,710) ; v1(1409.84,1035) U1.9 U1.10 ; U1.15 U1.16 ; U9.3 1642.8,252.2 1655,240 v1(1655,130) ; U1.17 U1.18 U1.19 U1.20 U1.21 ; U1.25 U1.26 ; U1.31 U1.32 ; C47.2@1771.93,1377.13 C47.2
  Bottom Layer w10: v1(1110,1361.38) 1053.62,1361.38 1040,1375 1040,1465 1065,1490 1215,1490 v1(1245,1460) ; v1(1276.02,721.54) 1281.79,715.77 1544.23,715.77 v1(1550,710)
  Bottom Layer w20: v1(1306.02,1035) v1(1409.84,1035) 1404.23,1040.61 1404.23,1152.89 v1(1398.62,1158.5)
  other v1: 2160,175 50,228.23 405,290 2255,470 2015,475 56.26,481.25 1590,505 898.62,690 65,820.06 2065,889.29 647.09,960 890,960 60,1116.38 400,1307.64 45,1390 1600,1471.83 40,1655 840,1750 1060,1820 2150,1820 835,1915 1715,2105 1045,2115 2150,2120 835,2130 566.14,2280 2294.37,2307.48
DRDY: P1.5 U1.46 | length 961.4
  Top Layer w10: U1.46 1291.65,1377.6 1291.65,1509.71 1215,1586.36 1215,1937.43 1365,2087.43 P1.5
FB1: R16.1 R28.2 U5.2 U5.6 | length 606.2
  Top Layer w10: U5.2 310.43,1580 ; R16.1 248.98,1707.4 248.98,1661.46 310.43,1600 310.43,1580 ; U5.6@414.37,1530 360.43,1530 310.43,1580 ; U5.6 505,1530 532.91,1502.09 R28.2
FB2: pad.5 R9.2 R27.1 U7.6 | length 728.9
  Top Layer w10: R27.1 272.99,1210 280,1202.99 280,1080 330,1030 ; R9.2 330.87,815 ; U7.6 330,1030 ; pad.5@430,815 330.87,815 ; 330,1030 330.87,1029.13 330.87,815
FB3: C16.1 R17.2 U3.2 U3.6 | length 573.7
  Top Layer w10: U3.2 284.15,485 ; C16.1 395.59,596.44 284.15,485 ; R17.2 510,473.62 510,440.86 504.14,435 U3.6 334.15,435 284.15,485
FB4: R2.3 R15.3 U6.6 | length 634.9
  Top Layer w10: R15.3 677.19,65 635.86,65 630,70.86 630,178.97 684.22,233.19 684.22,285 686.38,285 ; U6.6 686.38,285 ; R2.3@830,425 701.22,425 684.22,408 684.22,287.16 686.38,285
FB5: pad.8 R37.1 U8.2 U9.4 | length 1014.8
  Top Layer w10: U8.2@1227.32,227.09 U8.2 1228.8,227.34 1292.66,227.34 1395,125 1581.48,125 1605,148.52 1605,218.09 1596.48,226.61 U9.4 ; pad.8 R37.1@1390.16,622.76
  Bottom Layer w10: pad.8 v1(1405,130)
NetC9_1: C9.1 U1.13 | length 116.3
  Top Layer w10: U1.13 1488.58,856.42 1495.71,849.29 C9.1
NetC12_1: C12.1 U1.62 | length 96
  Top Layer w10: C12.1 1094.09,1051.73 U1.62
NetC13_1: C13.1 U1.59 | length 117.9
  Top Layer w10: C13.1 1087.2,1133.5 1093.7,1140 1104.27,1140 1133.48,1110.79 U1.59
NetC14_2: C14.2 R6.1 U4.7 | length 308.2
  Top Layer w10: U4.7 643.98,2090 C14.2 644.21,2229.68 R6.1
NetC15_2: C15.2 R7.1 U3.7 | length 330
  Top Layer w10: U3.7 460,485 504.14,529.14 504.14,552.61 C15.2 511.54,623.07 520,631.54 521.54,631.54 540,650 R7.1 ; R7.1@608.02,655 R7.1@611.93,651.09
NetC16_2: C16.2 R9.1 R10.2 | length 167.7
  Top Layer w10: R10.2 R9.1 283.62,646.14 301.5,628.27 C16.2
NetC17_2: C17.2 R10.1 U3.3 | length 367.7
  Top Layer w10: C17.2@176.54,631.54 C17.2@178.07,633.07 ; U3.3 135.86,435 114.61,456.25 114.61,539.61 180.87,605.87 180.87,635.87 C17.2 181.54,706.54 R10.1 R10.1@188.46,706.54
NetC18_2: C18.2 R12.1 U3.4 | length 177
  Top Layer w10: U3.4 183.54,291.46 C18.2 R12.1
NetC19_2: C19.2 R11.1 U4.4 | length 169.3
  Top Layer w10: U4.4 260,1988.43 C19.2 265.59,1894.41 326.06,1894.41 R11.1@333.35,1887.13
NetC20_2: C20.2 R13.1 U5.7 | length 203.9
  Top Layer w10: U5.7 R13.1 530,1583.62 C20.2
NetC21_2: C21.2 R14.1 U6.7 | length 452.9
  Top Layer w10: U6.7 805,335 862.76,277.24 899.14,277.24 905,271.39 R14.1 ; C21.2 929.14,108.46 950,129.32 950,215 936.54,228.46 R14.1@903.46,228.46
NetC22_1: C22.1 C23.2 R16.2 | length 227.5
  Top Layer w10: R16.2 296.93,1713.31 C23.2 C22.1
NetC23_1: C23.1 R20.1 U5.3 | length 429
  Top Layer w10: R20.1 105.87,1530 135,1530 145,1530 ; U5.3 145,1530 ; C23.1 165,1785 145,1765 145,1530
NetC24_2: C24.2 R21.1 U6.4 | length 507
  Top Layer w10: R21.1 216.26,47.76 230,34.02 329.02,34.02 338.46,43.46 338.46,65 C24.2@343.46,70 ; C24.2 C24.2@343.46,70 ; U6.4 466.18,235 455,223.82 455,120.98 404.02,70 C24.2@343.46,70
NetC25_2: C25.2 R22.1 U5.4 | length 190.9
  Top Layer w10: U5.4@190,1472.2 197.8,1480 U5.4 C25.2 207.28,1395.79 237.17,1395.79 250,1408.62 R22.1
NetC27_2: C27.2 R24.1 U7.7 | length 188.8
  Top Layer w10: U7.7 506.09,1080 C27.2 506.54,1154.84 R24.1 R24.1@515.16,1163.78
NetC28_2: C28.2 R25.1 U8.7 | length 499
  Top Layer w10: U8.7 1059.84,228.66 993.66,228.66 975,210 975,125 990,110 C28.2 R25.1@1290,110
NetC30_2: C30.2 R29.1 U8.4 | length 201.8
  Top Layer w10: U8.4 1351.54,280 C30.2 1356.54,353.78 R29.1
NetC31_2: C31.2 R30.1 U7.4 | length 175.5
  Top Layer w10: U7.4 182.56,896.18 C31.2 R30.1
NetC39_1: C39.1 C40.2 R36.2 U1.5 | length 634.1
  Top Layer w10: U1.5 1331.1,861.93 1334.57,858.46 C39.1 1391.39,858.46 1489.86,760 1625,760 1671.38,713.62 1671.38,644.8 C40.2 1683.7,647.52 1734.09,647.52 R36.2
NetC40_1: C40.1 C41.1 R37.2 U1.4 | length 615.6
  Top Layer w10: U1.4 1311.42,861.93 1307.95,858.46 C41.1 1276.02,839.14 1320,795.17 1320,721.54 1371.54,670 R37.2 1487.95,670 1527.95,630 1611.06,630 C40.1
NetP2_1: P2.1 U4.2 | length 178.1
  Top Layer w10: P2.1@97.76,2105 P2.1@107.76,2115 ; P2.1@110,2120 120,2110 150,2110 170,2090 U4.2
NetP2_2: P2.2 U4.3 | length 174
  Top Layer w10: P2.2@97.76,2005 P2.2@107.76,2015 ; P2.2@110,2020 150,2020 170,2040 U4.3
NetR5_1: R5.1 U1.8 | length 446.2
  Top Layer w10: U1.8 1390.16,880.91 1496.07,775 1655,775 1690,740 R5.1
NetR8_1: R8.1 U4.1 | length 87.1
  Top Layer w10: U4.1 261.57,2216.61 R8.1
NetR8_2: R8.2 U4.8 | length 207.6
  Top Layer w10: R8.2@382.44,2268.58 R8.2 383.15,2166.85 410,2140 U4.8
NetR15_2: R15.2 R17.1 U6.2 | length 471.8
  Top Layer w10: U6.2 590,335 ; R17.1 580,475 590,465 590,335 ; R15.2 590,123.2 590,335
NetR27_2: pad.10 R27.2 R28.3 U7.2 | length 1077.9
  Top Layer w10: U7.2 130,1080 118.62,1091.38 118.62,1189.61 139.01,1210 R27.2 195,1245 215,1265 617.44,1265 647.09,1294.65 R28.3 851.26,1361.26 pad.10
NetU8_6: U8.6 U9.8 | length 1184.4
  Top Layer w10: U8.6 1061.48,252.93 1102.11,252.93 v1(1150,205) ; v1(1175,520) 1270,520 1360,430 1610,430 1736.61,303.39 U9.8
  Bottom Layer w10: v1(1150,205) 1190,205 1205,220 1205,483.43 1175,513.43 v1(1175,520)
O_Net1: C22.2 pad.2 U4.6 | length 492.8
  Top Layer w10: U4.6 566.14,2040 pad.2 601.14,1785 C22.2
O_Net5: pad.7 R2.1 R2.2 R19.1 U8.3 | length 660.1
  Top Layer w10: R2.2 880,440 890,430 913.19,430 R2.1 925.28,371.26 943.46,353.07 R19.1 ; pad.7 1122.76,397.24 R19.1 ; U8.3 1145.59,254.41 1122.76,277.24 R19.1
OUT_+: pad.9 R36.1 U9.5 | length 539
  Top Layer w10: U9.5 1864.53,226.61 v1(1865,227.09) ; R36.1 1792.09,432.91 pad.9
  Bottom Layer w10: v1(1865,227.09) pad.9@1865,365
SCLK: P1.3 U1.42 | length 1052
  Top Layer w10: U1.42 1370.47,1473.31 1245,1598.79 1245,1925 P1.3
START: P1.1 U1.37 | length 1243.1
  Top Layer w10: U1.37 1468.82,1377.6 1468.82,1417.39 1275,1611.21 1275,1912.57 1536.21,2173.79 1693.79,2173.79 P1.1
VDD: C1.1 C3.1 C4.1 C26.2 R23.1 U1.1 U1.7 U1.11 U1.12 U1.53 U1.58 U2.3 U2.4 U9.2 | length 4401.6
  Top Layer w10: v1(1110,1230) 1111.1,1228.9 U1.53 ; v1(1165,720) 1154.18,720 1134.18,700 C3.1 1095,640.86 1098.06,637.8 1218.66,637.8 C4.1 1225,866.93 1252.36,894.29 U1.1 1252.36,1087.17 1285,1119.8 1240.2,1119.8 1229.53,1130.47 U1.58 ; U1.7 1370.39,942.56 1370.39,1042.07 v1(1292.66,1119.8) 1400.83,1119.8 1449.21,1071.42 U1.11 U1.12 1468.9,823.39 1502.28,790 2140,790 2178.46,828.46 C1.1 2178.46,1380.98 U2.4 U2.3 ; R23.1 1530,271.54 1533.74,275.28 1601.93,275.28 U9.2 1682.2,277.8 v1(1695,265)
  Bottom Layer w10: v1(1110,1230) 1220,1230 1290.12,1159.88 1290.12,1122.34 v1(1292.66,1119.8) ; v1(1165,720) 1165,636.09 1216.09,585 1655,585 1695,545 v1(1695,265)
VSS: C29.2 R26.1 U9.7 | length 282.7
  Top Layer w10: R26.1@1720.43,45.94 R26.1 1716.54,49.84 C29.2 1716.54,179.49 1730,192.95 1730,257.42 1747.85,275.28 1783.03,275.28 U9.7
pads on no net: R8.3 R15.1 R28.1 U1.39 U1.40 U1.41 U1.43 U1.45 U2.1 U3.1 U3.5 U3.8 U5.1 U5.5 U5.8 U6.1 U6.5 U6.8 U7.1 U7.5 U7.8 U8.1 U8.5 U8.8 U9.6
copper on no net: | length 2091.2
  Top Layer w10: -120.99,56.11 -100.99,-3.89 ; -120.99,2296.11 -100.99,2356.11 ; -110.99,-3.89 -90.99,-3.89 ; -110.99,2356.11 -90.99,2356.11 ; -100.99,895.2 -100.99,-3.89 ; -100.99,1457.02 -100.99,2356.11 ; -80.99,56.11 -100.99,-3.89 ; -80.99,2296.11 -100.99,2356.11

## Polygon pours and split planes (outlines as drawn)
DRATE1 on Bottom Layer "Top Layer-No Net" (solid, shelved, pour order 1): 0,0 0,2360 2360,2360 2360,0
DRATE1 on Top Layer "NONET_L01_P000" (solid, shelved, pour order 0): 0,0 0,2360 2360,2360 2360,0

## Other copper
Top Layer:
  text "2360 (mil)" at -65,905.2 h60 r90

## Silkscreen, mask and mechanical layers (free items; w line width, h text height)
Top Overlay:
  lines w10: 0,750 970,750 ; 0,1265 815,1265 975,1265 ; 5,1840 815,1840 970,1840 ; 975,0 975,2360 ; 980,585 1030,585 1725,585 1995,315 2360,315
  text "Charlie Vuong" at 1845,2195 h45
  text "T1" at 715,1900 h45
  text "IA" at 895,1860 h45
  text "ADC" at 1020,1516.42 h45
  text "T2" at 857.76,1440 h45
  text "HPF" at 805,1288.03 h45
  text "GAIN" at 795,1186.73 h45
  text "T3" at 475,790 h45
  text "T5" at 1450,485 h45
  text "T4" at 1060,465 h45
  text "T6" at 1834.8,270 h45
  text "S2D" at 2179.37,47.76 h45
  text "LPF" at 25,45 h45
  text "VC" at 745,25 h45
Mechanical 15:
  the board outline again, w10

## Dimensions
0,0 to 2360,0 on Top Layer